# EAGLE board controller_complete (EAGLE 7.5.0)
COMPANY: WellDone Technology; DIM_UNITS: inches; FAB_TEMPLATE: two_layer; HEIGHT: 1.5; PARTNAME: controller_iotile; REVISION: 5.0; WIDTH: 1.5
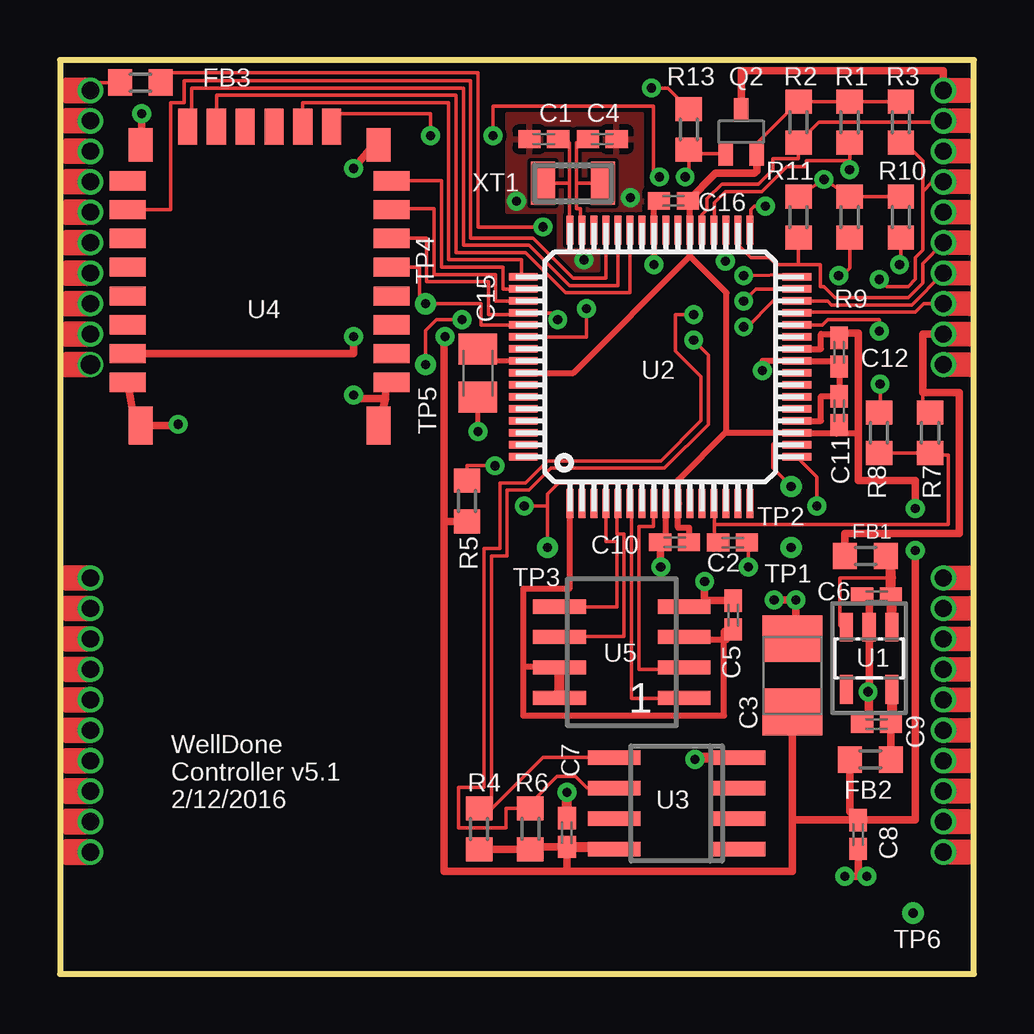
[diagram p0: board, top side]
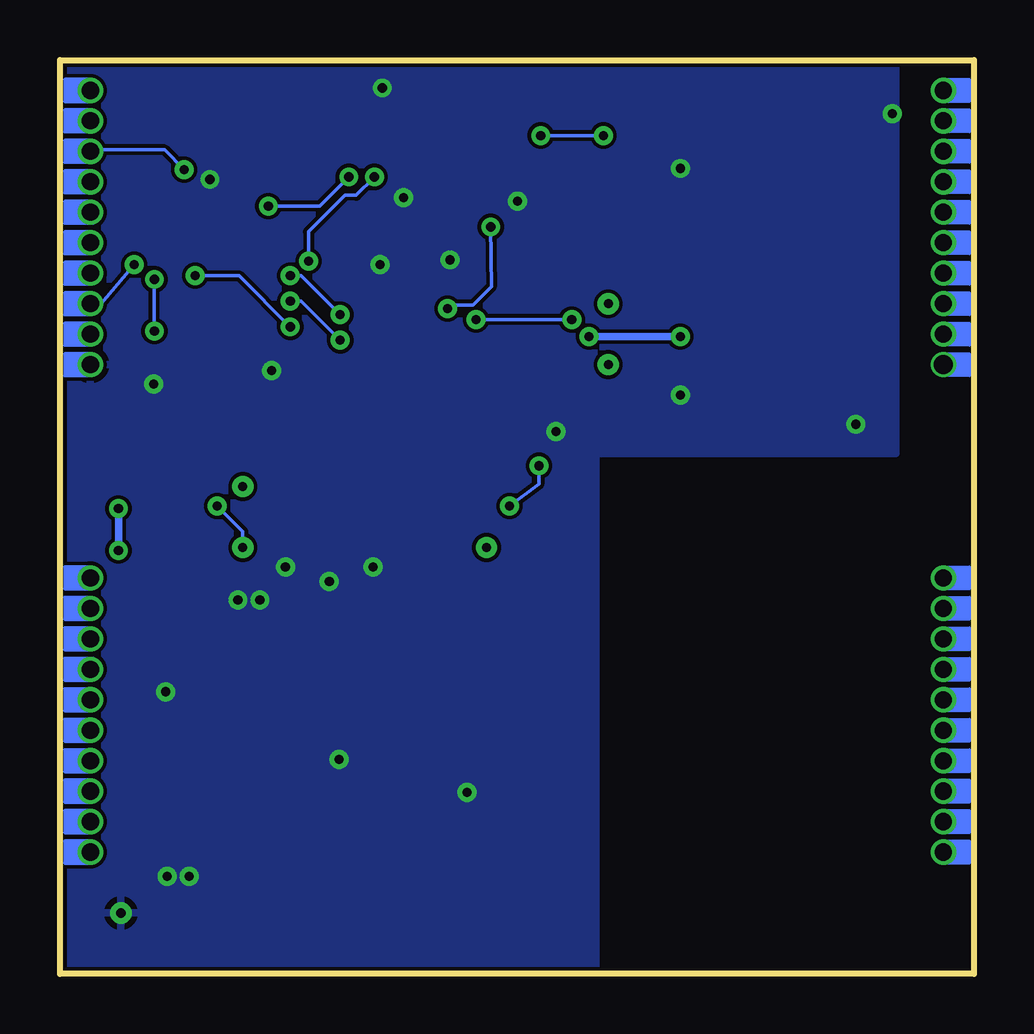
[diagram p1: board, bottom side, seen from below]

Size 38.1 x 38.1 mm. Coordinates in mm from the lower left corner, seen from the top.
Copper layers (1*16): Top 0.035mm / dielectric 1.5mm / Bottom 0.035mm
Design rules "default *": minimum track width 5mil, minimum drill 15mil, track to track 6mil, track to pad 6mil, pad to pad 6mil, via to via 6mil, smd to smd 6mil, copper to edge 6mil, drill to drill 6mil, minimum pad ring 5mil, minimum via ring 8mil, stop-mask expansion 4mil, vias tented up to drill 0mil, thermal gap 10mil
Net classes: 0 default: width 0.152 mm, drill 0.305 mm, clearance 0.152 mm

## Footprints (pad centres in the part's own frame; a part is rotated, then mirrored left to right if it is on the bottom)
C0402K = smd 0.925 x 0.74: 1 -0.6,0; 2 0.6,0
B/3528-21R = smd 1.95 x 2.5: + 1.525,0; - -1.525,0
C0805K = smd 1.3 x 1.6: 1 -1,0; 2 1,0
R0603 = smd 1 x 1.1: 1 -0.85,0; 2 0.85,0
M22_MODULE = drill 0.711 pad 1.049: IOA_1 17.78,-17.78; IOA_2 17.78,-16.51; IOA_3 17.78,-15.24; IOA_4 17.78,-13.97; IOA_5 17.78,-12.7; IOA_6 17.78,-11.43; IOA_7 17.78,-10.16; IOA_8 17.78,-8.89; IOA_9 17.78,-7.62; IOB_1 17.78,2.54; IOB_2 17.78,3.81; IOB_3 17.78,5.08; IOB_4 17.78,6.35; IOB_5 17.78,7.62; IOB_6 17.78,8.89; IOB_7 17.78,10.16; IOB_8 17.78,11.43; IOB_9 17.78,12.7; IOB_10 17.78,13.97; IOTILEA_1 -17.78,-17.78; IOTILEA_2 -17.78,-16.51; IOTILEA_3 -17.78,-15.24; IOTILEA_4 -17.78,-13.97; IOTILEA_5 -17.78,-12.7; IOTILEA_6 -17.78,-11.43; IOTILEA_7 -17.78,-10.16; IOTILEA_8 -17.78,-8.89; IOTILEA_9 -17.78,-7.62; IOTILEA_10 -17.78,-6.35; IOTILEB_1 -17.78,2.54; IOTILEB_2 -17.78,3.81; IOTILEB_3 -17.78,5.08; IOTILEB_4 -17.78,6.35; IOTILEB_5 -17.78,7.62; IOTILEB_6 -17.78,8.89; IOTILEB_7 -17.78,10.16; IOTILEB_8 -17.78,11.43; IOTILEB_9 -17.78,12.7; IOTILEB_10 -17.78,13.97 | drill 0.794 pad 1.049: IOA_10 17.78,-6.35
SOT323-BEC = smd 0.6 x 1: 1 -0.65,-0.9; 2 0.65,-0.9; 3 0,0.9
TESTPAD-15MIL = drill 0.381 pad 0.889: P$1 0,0
SOT23-5L = smd 0.55 x 1.2: 1 -0.95,-1.3; 2 0,-1.3; 3 0.95,-1.3; 4 0.95,1.3; 5 -0.95,1.3
TQFP64-10X10 = smd 1.2 x 0.3: 1 -5.7,3.75; 2 -5.7,3.25; 3 -5.7,2.75; 4 -5.7,2.25; 5 -5.7,1.75; 6 -5.7,1.25; 7 -5.7,0.75; 8 -5.7,0.25; 9 -5.7,-0.25; 10 -5.7,-0.75; 11 -5.7,-1.25; 12 -5.7,-1.75; 13 -5.7,-2.25; 14 -5.7,-2.75; 15 -5.7,-3.25; 16 -5.7,-3.75; 33 5.7,-3.75; 34 5.7,-3.25; 35 5.7,-2.75; 36 5.7,-2.25; 37 5.7,-1.75; 38 5.7,-1.25; 39 5.7,-0.75; 40 5.7,-0.25; 41 5.7,0.25; 42 5.7,0.75; 43 5.7,1.25; 44 5.7,1.75; 45 5.7,2.25; 46 5.7,2.75; 47 5.7,3.25; 48 5.7,3.75 | smd 0.3 x 1.2: 17 -3.75,-5.7; 18 -3.25,-5.7; 19 -2.75,-5.7; 20 -2.25,-5.7; 21 -1.75,-5.7; 22 -1.25,-5.7; 23 -0.75,-5.7; 24 -0.25,-5.7; 25 0.25,-5.7; 26 0.75,-5.7; 27 1.25,-5.7; 28 1.75,-5.7; 29 2.25,-5.7; 30 2.75,-5.7; 31 3.25,-5.7; 32 3.75,-5.7; 49 3.75,5.7; 50 3.25,5.7; 51 2.75,5.7; 52 2.25,5.7; 53 1.75,5.7; 54 1.25,5.7; 55 0.75,5.7; 56 0.25,5.7; 57 -0.25,5.7; 58 -0.75,5.7; 59 -1.25,5.7; 60 -1.75,5.7; 61 -2.25,5.7; 62 -2.75,5.7; 63 -3.25,5.7; 64 -3.75,5.7
SOIC8 = smd 0.6 x 2.2: 1 -1.905,-2.6; 2 -0.635,-2.6; 3 0.635,-2.6; 4 1.905,-2.6; 5 1.905,2.6; 6 0.635,2.6; 7 -0.635,2.6; 8 -1.905,2.6
RN20-BTLE-MODULE = smd 1.5 x 0.8: AIO0 0.25,7.3; AIO1 0.25,8.5; AIO2 0.25,9.7; CMD/MLDP 0.25,2.5; GND 11.25,10.9; GND1 0.25,10.9; PIO7 11.25,4.9; RSVD1 11.25,6.1; RSVD2 11.25,7.3; RSVD3 11.25,8.5; RTS/PIO6 11.25,3.7; SPI/PIO 11.25,2.5; UART_RX 0.25,4.9; UART_TX 0.25,6.1; VDD 11.25,9.7; WAKE_SW 0.25,3.7 | smd 0.8 x 1.5: PIO1 2.75,0.25; PIO2 3.95,0.25; PIO3 5.15,0.25; PIO4 6.35,0.25; PIO5 7.55,0.25; WAKE_HW 8.75,0.25 | smd 1 x 1.4: SHIELD1 0.8,1; SHIELD2 10.7,1 | smd 1 x 1.6: SHIELD3 0.8,12.7; SHIELD4 10.7,12.7
SOP08 = smd 0.6 x 2.2: 1 -1.905,-2.6; 2 -0.635,-2.6; 3 0.635,-2.6; 4 1.905,-2.6; 5 1.905,2.6; 6 0.635,2.6; 7 -0.635,2.6; 8 -1.905,2.6
2-SMD-XTAL = smd 1 x 1.8: 1 -1.25,0; 2 1.25,0

## Placement (x,y rotation side)
C1  22 pF  [C0402K]  20.17,34.8 180 top
C2  100 nF  [C0402K]  28.04,17.98 0 top
C3  100 uF  [B/3528-21R]  30.53,12.45 270 top
C4  22 pF  [C0402K]  22.61,34.8 0 top
C5  100 nF  [C0402K]  28.07,14.96 90 top
C6  1 uF  [C0402K]  34.04,15.75 180 top
C7  100nF  [C0402K]  21.13,5.89 90 top
C8  10 pF  [C0402K]  33.27,5.82 270 top
C9  1 uF  [C0402K]  34.04,10.41 180 top
C10  100nF  [C0402K]  25.62,17.99 180 top
C11  100nF  [C0402K]  32.48,23.48 90 top
C12  100 nF  [C0402K]  32.48,25.92 270 top
C15  10 uF  [C0805K]  17.42,25.04 270 top
C16  100nF  [C0402K]  25.57,32.22 180 top
FB1  [R0603]  33.58,17.42 0 top
FB2  [R0603]  33.78,8.94 180 top
FB3  [R0603]  3.35,37.16 180 top
MOD1  M22_MODULE  [M22_MODULE]  19.05,19.05 180 top
Q2  P-MOSFET-SC70  [SOT323-BEC]  28.4,35.1 0 top
R1  1K  [R0603]  32.92,35.51 90 top
R2  1K  [R0603]  30.78,35.51 90 top
R3  1K  [R0603]  35.05,35.51 90 top
R4  1K  [R0603]  17.48,6.05 270 top
R5  10K  [R0603]  16.97,19.71 270 top
R6  1K  [R0603]  19.61,6.05 270 top
R7  510K  [R0603]  36.27,22.56 90 top
R8  510K  [R0603]  34.14,22.56 270 top
R9  10K  [R0603]  32.92,31.55 270 top
R10  10K  [R0603]  35.05,31.55 270 top
R11  10K  [R0603]  30.78,31.55 270 top
R13  100K  [R0603]  26.21,35.2 270 top
TP1  TESTPAD-15MIL  [TESTPAD-15MIL]  30.48,17.78 0 top
TP2  TESTPAD-15MIL  [TESTPAD-15MIL]  30.48,20.32 0 top
TP3  TESTPAD-15MIL  [TESTPAD-15MIL]  20.32,17.78 0 top
TP4  TESTPAD-15MIL  [TESTPAD-15MIL]  15.24,27.94 0 top
TP5  TESTPAD-15MIL  [TESTPAD-15MIL]  15.24,25.4 0 top
TP6  TESTPAD-15MIL  [TESTPAD-15MIL]  35.56,2.54 0 top
U1  XC6504-LINEAR-REGULATOR  [SOT23-5L]  33.73,13.16 180 top
U2  PIC24FJ64GA306  [TQFP64-10X10]  25.02,25.31 90 top
U3  ATECC508A  [SOIC8]  25.7,7.11 90 top
U4  RN4020_BT_4.0_MODULE  [RN20-BTLE-MODULE]  14.07,35.56 180 top
U5  FLASH8MSOP8  [SOP08]  23.42,13.41 90 top
XT1  32.768 khz  [2-SMD-XTAL]  21.39,32.97 0 top

## Library data of the parts
C1 C4 = rcl; DIGIKEY-PN: 490-5868-1-ND
C2 C5 C7 C10-C12 C16 = rcl; DIGIKEY-PN: 445-1265-1-ND
C3 = rcl; DIGIKEY-PN: 478-8153-1-ND; FOOTPRINT: SMD1411
C6 C9 = rcl; DIGIKEY-PN: 445-4114-1-ND
C8 = rcl; DIGIKEY-PN: 490-3113-1-ND
C15 = rcl; DIGIKEY-PN: 490-10516-1-ND
FB1-FB3 = rcl; DESCRIPTION: Murata Ferrite Bead; DIGIKEY-PN: 490-5981-1-ND; FOOTPRINT: SMD0603
MOD1 = formfactors; POPULATE: no
Q2 = components; DESCRIPTION: P channel MOSFET; DIGIKEY-PN: 785-1085-1-ND; FOOTPRINT: SOT-323
R1-R4 R6 = rcl; DIGIKEY-PN: 311-1.00KHRCT-ND
R5 R9-R11 = rcl; DIGIKEY-PN: P10.0KHCT-ND
R7 R8 = rcl; DIGIKEY-PN: P510KHCT-ND
R13 = rcl; DIGIKEY-PN: P100KHCT-ND
TP1-TP6 = connectors; POPULATE: no
U1 = custom_ics; DESCRIPTION: XC6504 Linear Regulator 2.8V; DIGIKEY-PN: 893-1200-1-ND; FOOTPRINT: SOT23-5
U2 = components; DESCRIPTION: PIC24FJ64GA306 Microcontroller; DIGIKEY-PN: PIC24FJ64GA306-I/PT-ND; FOOTPRINT: TQFN64-10mm
U3 = custom_ics; DESCRIPTION: Atmel ECC Cryptography Chip; DIGIKEY-PN: ATECC508A-SSHCZ-TCT-ND; FOOTPRINT: SOIC-8
U4 = custom_ics; DESCRIPTION: RN4020 Bluetooth 4.0 Module; DIGIKEY-PN: RN4020-V/RM120-ND; FOOTPRINT: Custom SMD
U5 = components; DESCRIPTION: Winbond 2MB Serial Flash; DIGIKEY-PN: W25Q16DVSSIG-ND
XT1 = components; DESCRIPTION: 32.768 khz crystal (70 kOhm series resistance); DIGIKEY-PN: 535-9542-1-ND; FOOTPRINT: Custom SMD

## Nets
CHG_EN: FB3.1 U2.54
CMD: U2.50 U4.CMD/MLDP
CONN: U2.35 U4.PIO1
CS: U2.6 U5.1
CTS: U2.43 U4.PIO5
GND: C1.2 C2.2 C3.- C4.2 C5.2 C6.2 C7.2 C8.2 C9.2 C10.2 C11.2 C12.2 C15.2 C16.2 MOD1.IOTILEA_10 R8.1 R9.1 R10.1 R11.1 R13.1 TP6.P$1 U1.2 U2.9 U2.20 U2.25 U2.41 U3.4 U4.GND U4.GND1 U4.SHIELD1 U4.SHIELD2 U4.SHIELD3 U4.SHIELD4 U5.4
HSCLK: MOD1.IOTILEA_6 R11.2 U2.34
HSDIN: MOD1.IOTILEA_7 R9.2 U2.30
HSDOUT: MOD1.IOTILEA_8 R10.2 U2.29
ICLK: MOD1.IOTILEA_2 R2.1 U2.37
IDAT: MOD1.IOTILEA_3 R1.1 U2.36
IRQ: MOD1.IOTILEA_4 R3.1 U2.28
MEM_POW: C5.1 U2.1 U5.3 U5.7 U5.8
MLDP_EV: U2.49 U4.PIO2
N$1: C9.1 FB2.1 U1.5
N$2: C6.1 FB1.2 U1.1 U1.3
N$3: C1.1 U2.48 XT1.1
N$4: R5.1 TP3.P$1 U2.7
N$5: C4.1 U2.47 XT1.2
N$6: TP1.P$1 U2.17
N$7: TP2.P$1 U2.18
N$8: FB3.2 MOD1.IOA_1
RTS: U2.45 U4.RTS/PIO6
RX: TP5.P$1 U2.52 U4.UART_RX
SCL2: R6.1 U2.32 U3.6
SCLK: U2.5 U5.6
SDA2: R4.1 U2.31 U3.5
SDI: U2.8 U5.2
SDO: U2.4 U5.5
TX: TP4.P$1 U2.53 U4.UART_TX
V+: FB1.1 MOD1.IOTILEA_9 R7.2
VBAT_SAMP: C2.1 R7.1 R8.2 U2.13
VCAP: C15.1 U2.56
VCC_EN: Q2.1 R13.2 U2.33
VCCINT: C3.+ C7.1 C8.1 C10.1 C11.1 C12.1 C16.1 FB2.2 Q2.2 R1.2 R2.2 R3.2 R4.2 R5.2 R6.2 U2.10 U2.19 U2.26 U2.38 U2.57 U3.8 U4.VDD
VCCIO: MOD1.IOTILEA_1 Q2.3
WAKE_HW: U2.44 U4.WAKE_HW
WAKE_SW: U2.51 U4.WAKE_SW

## Tracks (layer width: path | path; a pad name or v marks a point on that pad's centre or on a via)
CHG_EN  (via drill 0.38)
  Top 0.152: FB3.1 4.2,37.57 17.42,37.57 17.42,31.14 v20.14,31.14 | v21.95,27.74 21.95,26.56 U2.54
  Bottom 0.152: v20.14,31.14 20.12,28.65 20.88,27.89 21.79,27.89 v21.95,27.74
CMD
  Top 0.152: U2.50 18.47,28.56 18.47,29.46 15.9,29.46 15.9,33.06 U4.CMD/MLDP
CONN  (via drill 0.38)
  Top 0.152: U4.PIO1 11.48,35.31 | 11.48,35.31 11.48,34.65 | v18.06,34.95 18.06,36.17 24.74,36.17 24.74,33.33 v24.99,33.22 | 27.79,31.01 U2.35 27.74,30.98 v27.74,29.72 | 11.48,35.31 11.48,35.87 15.44,35.87 v15.44,34.95
  Bottom 0.152: v15.44,34.95 v18.06,34.95 | 27.77,29.75 v27.74,29.72 27.74,30.94 26.21,32.46 25.76,32.46 v24.99,33.22
CS
  Top 0.152: U5.1 26.02,11.48 24.38,11.48 24.28,11.48 23.82,11.48 23.82,19.61 U2.6 23.8,19.58
CTS
  Top 0.152: U4.PIO5 6.52,36.63 16.51,36.63 16.51,30.07 19.41,30.07 21.08,28.4 23.77,28.4 U2.43
GND  (via drill 0.38)
  Top 0.152: 26.26,15.32 26.87,15.32 26.87,15.56 | C2.2 28.7,17.98 v28.7,16.97 | R8.1 34.19,23.41 v34.19,24.59 | R13.1 25.34,36.93 v24.66,36.93 | R11.1 v31.85,33.12 R9.1 R10.1
  Top 0.203: v17.42,22.61 C15.2
  Top 0.254: U2.20 31.72,23.06 31.72,24.09 C11.2 C12.2 32.48,25.56 U2.25 29.28,25.56 v29.28,25.15 | v24.76,29.57 24.77,29.42 U2.41 24.77,32.22 C16.2 | C10.2 25.27,17.99 U2.9
  Top 0.305: 3.68,22.59 U4.SHIELD4 | 25.17,17.99 C10.2 25.02,16.99 v25.04,16.97 | v26.87,16.36 26.87,15.56 C5.2 27.94,15.69 | U5.4 26.26,15.32 26.26,15.29 26.11,15.29 | U4.GND1 13.58,24.66 13.58,23.98 | 13.58,23.98 U4.SHIELD3 | U4.SHIELD4 3.13,22.86 U4.GND | U4.SHIELD4 4.93,22.86 v4.93,22.91 | U4.SHIELD1 13.46,34.56 13.46,34.49 13.01,34.49 v12.24,33.58 | C6.2 33.73,15.9 U1.2 33.73,10.57 C9.2 33.69,10.57 v33.69,11.76 33.73,11.72 | v12.24,24.13 12.24,23.98 13.58,23.98 | 29.77,13.97 C3.- 30.68,14.12 v30.68,15.6 v29.77,15.6 | v3.4,35.87 3.4,34.56 U4.SHIELD2 | v32.72,4.06 v33.63,4.06 33.27,4.06 C8.2
  Top 0.406: 21.13,6.34 C7.2 v21.13,7.57 | v26.47,8.94 26.47,9.02 U3.4
  other vias: 19.02,32.21 23.77,32.36 21.84,29.77
  pour Top (isolate 0.152): 18.64,35.86 18.64,31.75 24.28,31.75 24.28,35.86
  pour Bottom (isolate 0.152, rank 6, no thermals): 18.64,36.02 18.64,31.75 20.62,31.75 20.62,29.31 22.45,29.31 22.45,31.75 24.28,31.75 24.28,36.02
  pour Top (isolate 0.152, rank 2, no thermals): 18.64,32.82 18.64,31.75 20.78,31.75 20.78,29.31 22.45,29.31 22.45,30.23 20.93,30.23 20.93,32.21 19.41,32.21 19.41,32.82
  pour Bottom (isolate 0.152, rank 2): 3.25,38.3 38.3,38.3 38.3,0.2 15.75,0.05 15.75,21.69 3.25,21.69
HSCLK
  Top 0.152: U2.34 28.27,30.41 28.8,29.87 29.57,29.87 29.87,29.57 30.79,29.57 | 30.79,29.57 31.7,29.57 31.7,28.65 31.85,28.65 32.31,28.19 35.36,28.19 35.97,28.8 35.97,29.62 MOD1.IOTILEA_6 | R11.2 30.79,29.57
HSDIN  (via drill 0.38)
  Top 0.152: MOD1.IOTILEA_7 35.51,27.89 32.16,27.89 32,28.04 30.73,28.04 U2.30 30.7,28.04 29.72,28.04 28.65,26.98 v28.5,26.98 | R9.2 32.92,29.41 32.61,29.11 v32.46,29.11
  Bottom 0.152: v32.46,29.11 30.63,29.11 v28.5,26.98
HSDOUT  (via drill 0.38)
  Top 0.152: U2.29 30.74,27.58 35.66,27.58 36.02,27.94 MOD1.IOTILEA_8 | v35,29.57 35.05,29.62 R10.2
  Bottom 0.152: v35,29.57 36.37,27.94 MOD1.IOTILEA_8
ICLK
  Top 0.152: U2.37 26.77,31.64 26.98,31.85 26.98,32.31 27.58,32.92 29.11,32.92 29.72,33.53 29.72,33.98 30.79,33.98 R2.1 31.64,35.51 36.83,35.51 MOD1.IOTILEA_2
IDAT  (via drill 0.38)
  Top 0.152: U2.36 27.28,31.02 27.28,32.16 27.74,32.61 29.26,32.61 30.3,33.66 31.11,33.66 31.11,33.91 32.92,33.91 | 32.98,34.29 R1.1 32.92,33.91 | 32.92,33.91 v32.92,33.53
  Bottom 0.152: MOD1.IOTILEA_3 36.77,34.35 33.74,34.35 v32.92,33.53
IRQ  (via drill 0.38)
  Top 0.152: U2.28 31.78,27.06 32,27.28 34.16,27.28 v34.16,26.8 | R3.1 35.51,34.35 35.97,33.9 35.97,32.61 | 35.97,32.61 35.97,30.18 35.66,29.87 35.66,28.96 35.36,28.65 34.47,28.65 v34.16,28.96 | 35.97,32.61 36.37,33.02 MOD1.IOTILEA_4
  Bottom 0.152: v34.16,26.8 v34.16,28.96
MEM_POW
  Top 0.203: U5.7 20.82,12.8 | 19.3,12.8 19.3,12.7 | 27.69,14.31 C5.1
  Top 0.254: 20.82,12.8 19.3,12.8 | U5.3 26.02,13.92 27.79,13.92 27.79,14.31 27.69,14.31 27.69,10.77 19.3,10.77 19.3,12.7 19.3,16.05 21.23,16.05 21.23,19.61 U2.1
  Top 0.406: U5.8 U5.7
MLDP_EV
  Top 0.152: U4.PIO2 10.12,36.32 16.2,36.32 16.2,29.77 19.24,29.77 19.24,29.13 U2.49
N$1
  Top 0.305: U1.5 34.68,11.94 | FB2.1 C9.1
  Top 0.406: U1.5 34.68,10.41 C9.1
N$2
  Top 0.152: U1.3 32.78,14.53 32.51,14.53 32.51,16.51 34.64,16.51
  Top 0.406: FB1.2 34.64,17.12 34.64,16.51 C6.1 34.68,15.75 U1.1
N$3
  Top 0.152: U2.48 21.23,31.01 21.23,32.97 | 21.23,32.97 XT1.1 | 21.23,32.97 21.23,34.65 C1.1
N$4  (via drill 0.38)
  Top 0.152: U2.7 24.27,20.47 20.78,20.47 20.32,20.02 20.32,19.51 | 20.32,19.51 TP3.P$1 | R5.1 16.97,21.18 v18.14,21.18 | v19.36,19.51 20.32,19.51
  Bottom 0.152: v18.14,21.18 18.14,20.42 v19.36,19.51
N$5
  Top 0.152: XT1.2 21.54,32.97 | 21.77,34.49 C4.1 21.54,34.65 21.54,32.97 | U2.47 21.69,31.01 21.69,31.9 21.54,31.9 21.54,32.97
N$6  (via drill 0.38)
  Top 0.152: U2.17 31.55,20.73 v31.55,19.51
  Bottom 0.152: v31.55,19.51 30.48,18.44 TP1.P$1
N$7
  Top 0.152: TP2.P$1 29.72,21.08 29.72,22.1 29.76,22.06 U2.18
N$8
  Top 0.152: MOD1.IOA_1 1.27,37.16 FB3.2
RTS
  Top 0.152: U2.45 22.77,29.01 21.39,29.01 19.71,30.68 17.12,30.68 17.12,37.24 5.18,37.24 5.18,36.32 4.62,36.32 4.62,31.86 U4.RTS/PIO6
RX  (via drill 0.38)
  Top 0.152: 14.13,30.53 U4.UART_RX 14.13,30.68 15.29,30.68 15.29,28.85 17.86,28.85 17.86,27.48 19.32,27.48 U2.52 20.6,27.56 v20.75,27.28 | v16.76,27.28 15.7,27.28 15.24,26.82 TP5.P$1
  Bottom 0.152: 16.61,27.28 v16.76,27.28 v20.75,27.28
SCL2  (via drill 0.38)
  Top 0.152: U2.32 30.71,29.16 v28.5,29.11 | v26.42,27.48 25.65,27.48 25.65,25.96 26.72,24.89 26.72,23.06 25.04,21.39 20.32,21.39 19.41,20.47 18.34,20.47 18.34,17.73 17.68,17.73 17.68,7.77 16.61,7.77 16.61,6.1 18.59,6.1 18.59,6.89 R6.1 19.61,7.11 20.73,8.23 21.49,8.23 21.97,7.75 U3.6
  Bottom 0.152: v28.5,29.11 28.04,29.11 v26.42,27.48
SCLK
  Top 0.152: U5.6 20.82,14.07 23.52,14.07 23.52,18.34 23.22,18.34 23.22,19.61 U2.5
SDA2  (via drill 0.38)
  Top 0.152: U3.5 20.14,9.02 18.02,6.89 R4.1 17.78,6.86 17.98,6.86 17.98,17.42 18.64,17.42 18.64,20.17 19.56,20.17 20.47,21.08 25.2,21.08 27.03,22.91 27.03,25.81 v26.42,26.42 | U2.31 29.01,28.56 v28.5,28.04
  Bottom 0.152: v28.5,28.04 28.04,28.04 v26.42,26.42
SDI
  Top 0.152: U5.2 26.02,12.7 24.13,12.7 24.13,18.64 24.74,18.64 24.74,19.61 U2.8
SDO
  Top 0.152: 22.73,19.61 U2.4 22.76,19.61 22.76,18.03 23.22,18.03 23.22,15.29 20.82,15.29 U5.5
TX
  Top 0.152: U2.53 17.55,27.06 17.55,27.94 TP4.P$1 14.99,27.94 14.99,29.46 14.13,29.46 U4.UART_TX
V+
  Top 0.152: R7.2 35.97,23.35 35.97,24.23
  Top 0.305: FB1.1 32.73,18.36 37.49,18.36 37.49,24.23 35.97,24.23 35.97,26.67 MOD1.IOTILEA_9
VBAT_SAMP
  Top 0.152: U2.13 27.28,18.75 | 34.24,21.65 R8.2 R7.1 36.32,21.64 37.03,21.64 37.03,18.75 27.28,18.75 | C2.1 27.28,17.98 27.28,18.75
VCAP
  Top 0.203: U2.56 17.42,25.56 C15.1
VCC_EN  (via drill 0.38)
  Top 0.152: 28.77,31.28 U2.33 | U2.33 28.77,30.99 | 29.72,32 v29.41,32 28.96,32 28.8,31.85 28.8,31.05 U2.33 | Q2.1 26.21,34.2 R13.2 26.21,33.22 v26.06,33.22
  Bottom 0.152: v26.06,33.22 27.28,32 v29.41,32
VCCINT  (via drill 0.38)
  Top 0.152: R3.2 R1.2 R2.2 29.05,34.62 Q2.2
  Top 0.254: U2.26 31.72,26.06 31.72,26.68 32.32,26.68 C12.1 | 32.48,22.71 C11.1 arc-90 32.16,22.56 U2.19 | U2.10 25.77,18.6 26.23,18.6 C10.1 | U2.19 | C16.1 26.27,32.03 U2.38 26.26,29.92 | U2.10 25.78,20.6 27.79,22.61 | 27.79,22.61 27.79,28.4 26.26,29.92 | U2.57 21.4,25.06 26.26,29.92 | U2.19 27.84,22.56 27.79,22.61 | 32.36,22.56 33.27,22.56 arc-90 33.27,22.55
  Top 0.305: U2.10 | 32.36,22.56 arc90 C11.1 | 32.48,26.72 33.27,26.72 33.27,22.55 33.27,20.57 35.66,20.57 v35.66,19.41 | 32.48,26.83 32.48,26.72 | 32.48,26.72 C12.1 | 26.07,32.27 C16.1 27.33,33.38 28.96,33.38 29.05,33.47 Q2.2 | v12.24,26.57 12.24,25.86 U4.VDD | R5.2 16,18.86 | v35.66,17.65 35.66,6.42 C8.1 | R4.2 R6.2 19.71,5.29 C7.1 21.13,4.27 | 30.53,8.94 C3.+ 30.53,6.42 | 30.53,6.42 30.53,4.27 21.13,4.27 | 16,18.86 16,4.27 21.13,4.27 | v16.05,26.57 16,26.57 16,18.86 | FB2.2 32.93,6.76 C8.1 | C8.1 30.53,6.42
  Top 0.406: C7.1 23.11,5.29 U3.8
  Bottom 0.305: v35.66,17.65 v35.66,19.41 | v12.24,26.57 v16.05,26.57
VCCIO
  Top 0.305: MOD1.IOTILEA_1 36.83,37.64 28.4,37.64 Q2.3
WAKE_HW
  Top 0.152: U2.44 23.27,28.7 21.23,28.7 19.56,30.38 16.82,30.38 16.82,36.93 5.49,36.93 5.49,35.31 U4.WAKE_HW
WAKE_SW
  Top 0.152: U2.51 18.16,28.06 18.16,29.16 15.6,29.16 15.6,31.9 14.13,31.9 U4.WAKE_SW

## Text on the board
tPlace: WellDone / Controller v5.1 / 2/12/2016